# Altium PCB WeeMouseA3000internal.PcbDoc
Units mm, origin at the board's own origin, x right, y up, seen from the top; angles counter-clockwise.
Board outline 18.41 x 37.08 mm, 2 copper layers (F.Cu, B.Cu), stack 1.571 mm thick; 6 components, 13 nets, 36 pads, 24 vias.
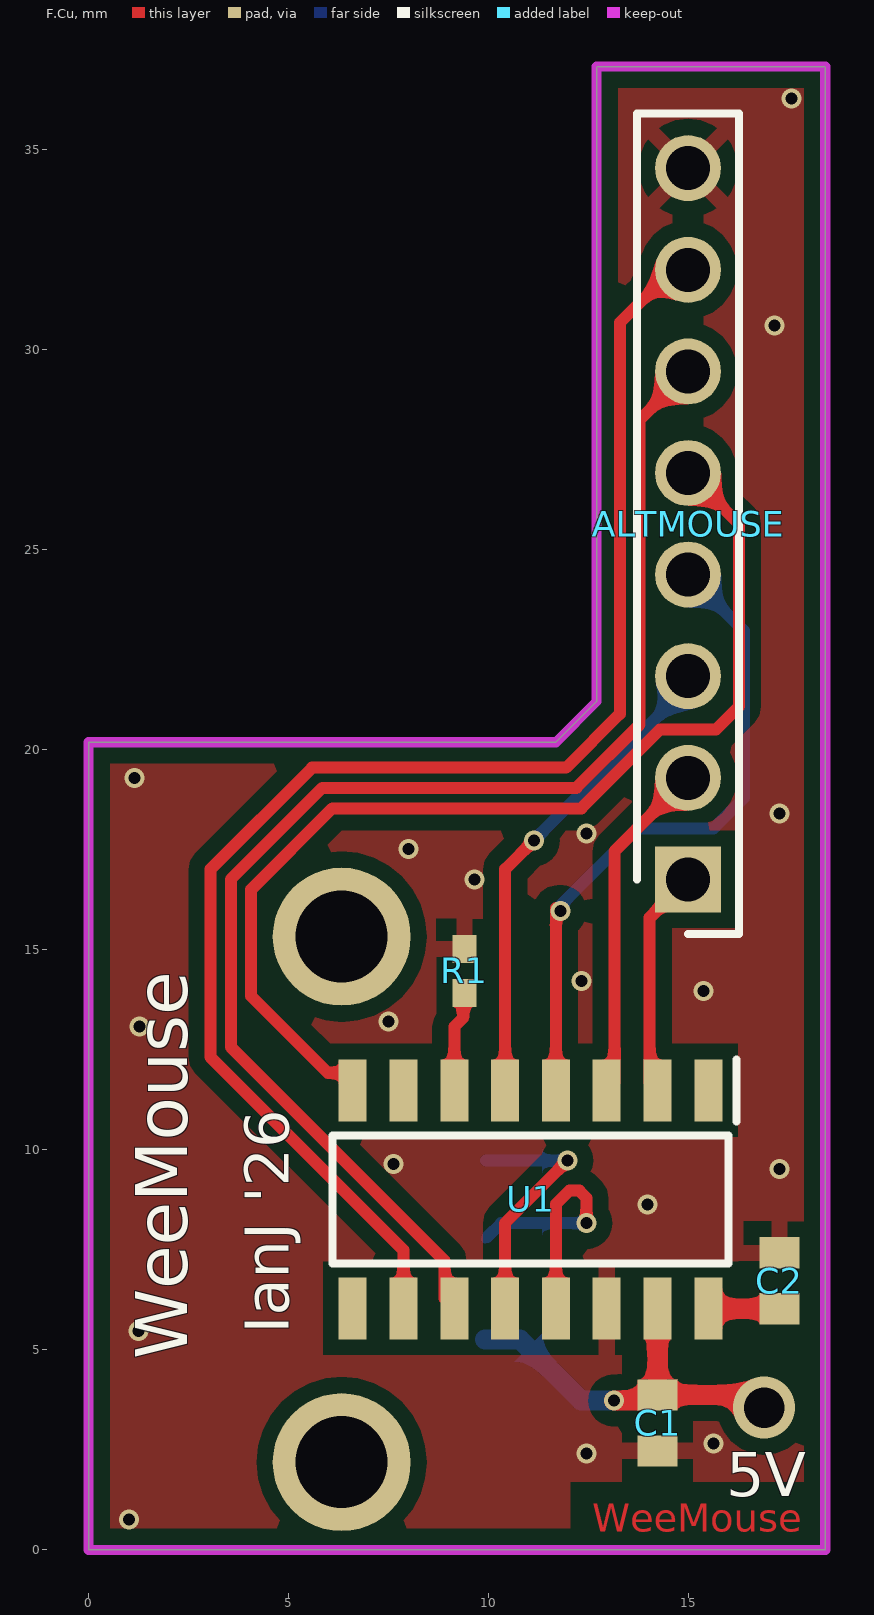
[diagram p0: F.Cu view]
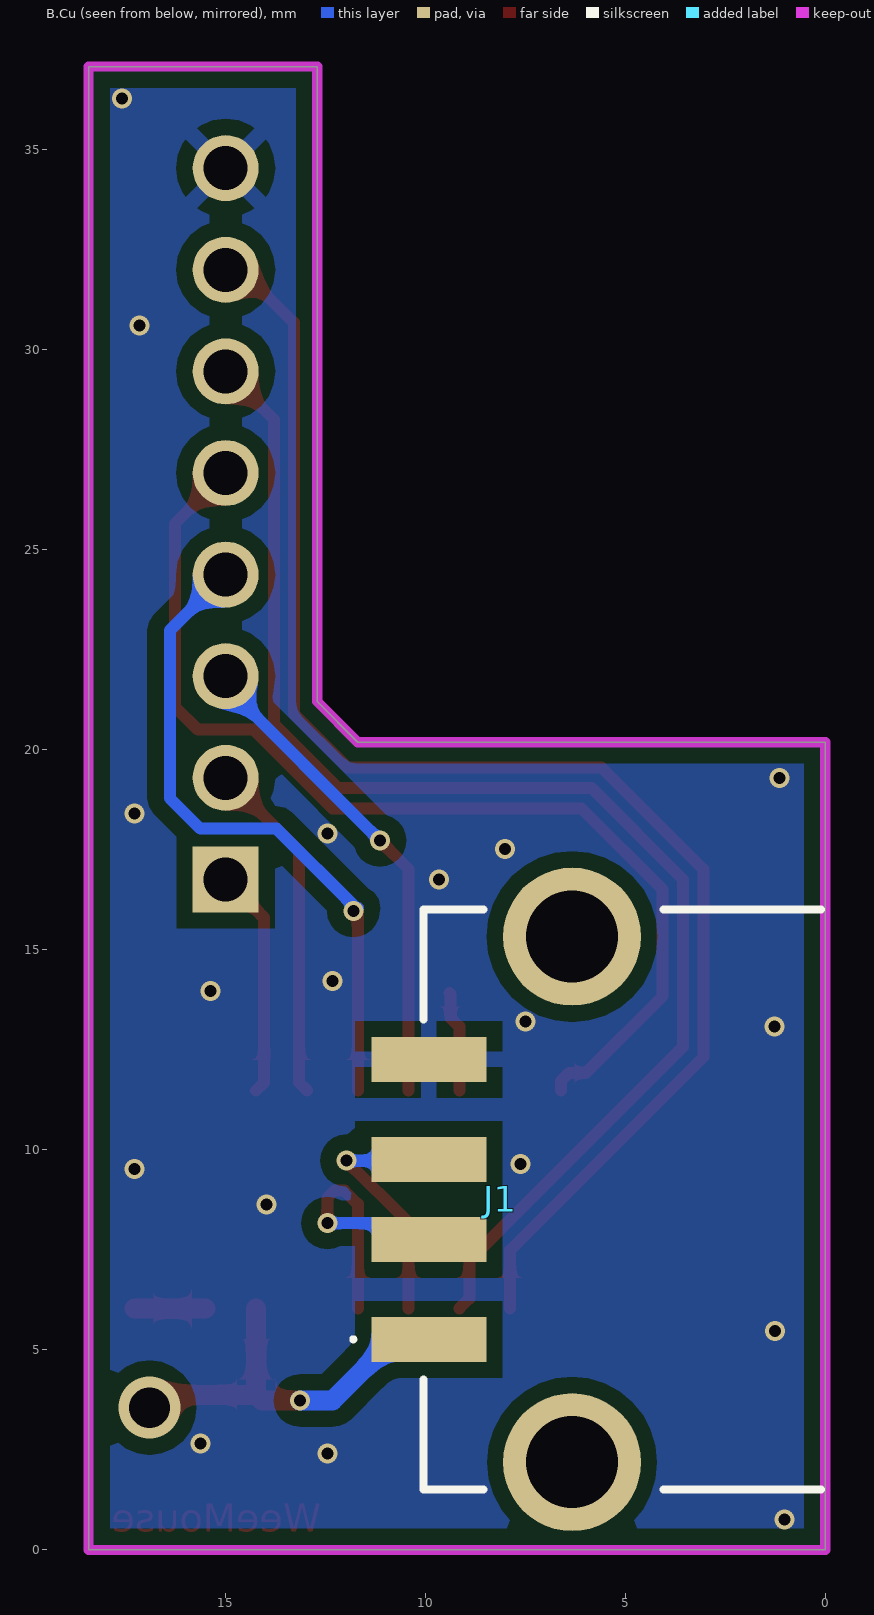
[diagram p1: B.Cu view, seen from below]
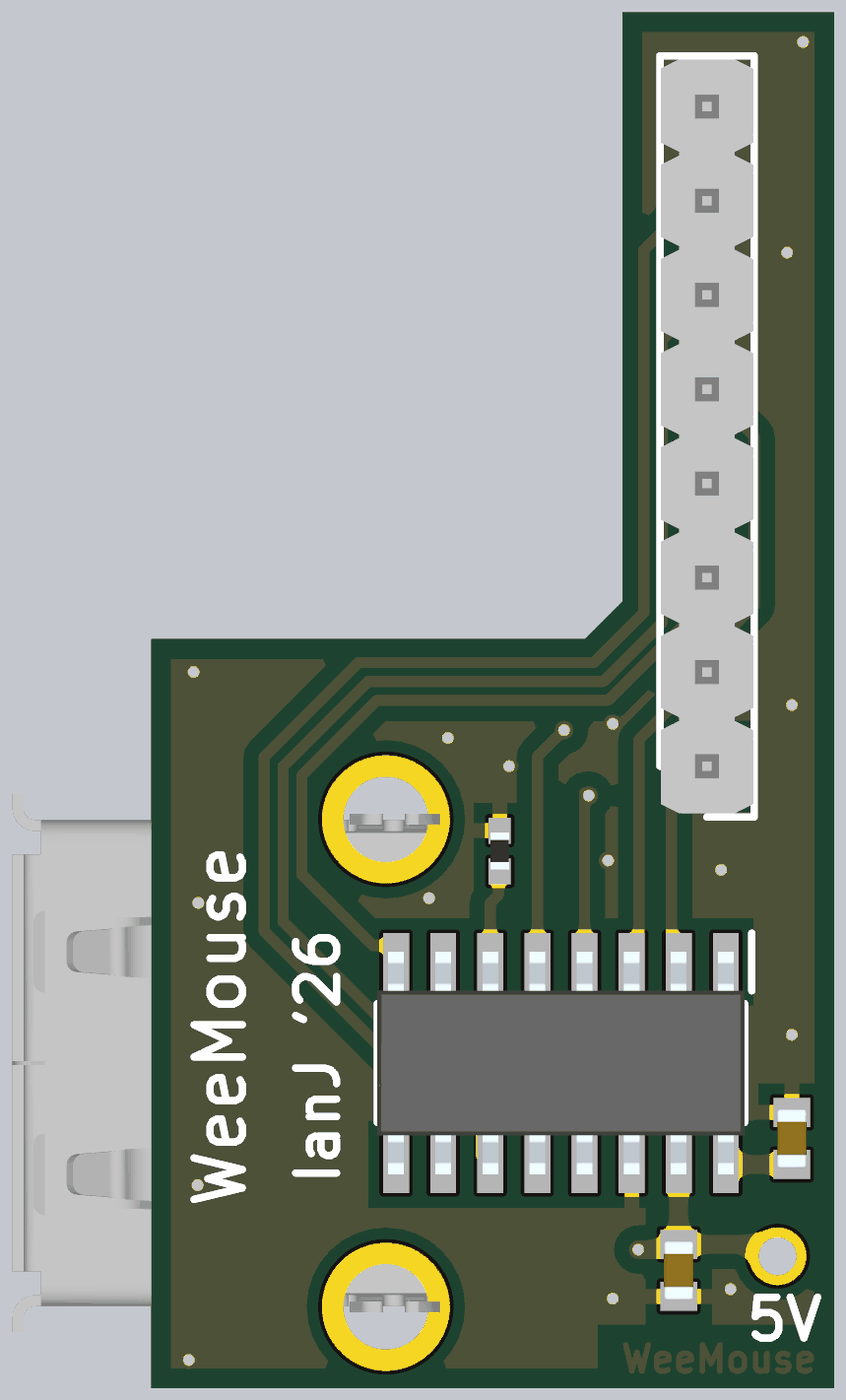
[diagram p2: 3D render of the assembled board from above, using the file's embedded part models]

## Layer stack, top to bottom
F.Mask: solder mask 0.0102, Solder Resist, Dk 3.5
F.Cu: signal copper 0.0356
Dielectric 2: prepreg 0.2, PP-006, Dk 4.1
Dielectric 1: dielectric 1.1, FR-4, Dk 4.8
Dielectric 3: prepreg 0.2, PP-006, Dk 4.1
B.Cu: signal copper 0.0356
B.Mask: solder mask 0.0102, Solder Resist, Dk 3.5

## Board outline
12.7,21.209 11.684,20.193 0,20.193 0,0 18.415,0 18.415,37.084 12.7,37.084

## Design rules (kind name [scope] priority, off if disabled: settings)
Clearance "Clearence 0.4_Polygon" [InNamedPolygon('B.Cu-GND') OR InNamedPolygon('F.Cu-GND')] p1: gap=0.4 ignorepadtopadclearanceinfootprint=FALSE
Clearance "Clearence 0.2_NetClass" [InNetClass('Default')] p2: gap=0.2 ignorepadtopadclearanceinfootprint=FALSE
HoleSize "Hole Size (Default)" [All] p1: absolutevalues=TRUE maxlimit=10 minlimit=0.3 maxpercent=80.000 minpercent=20.000
MinimumSolderMaskSliver [All] p1: minsoldermaskwidth=0
PolygonConnect Polygon_F.Cu-GND_ConnectDirect [IsNamedPolygon('F.Cu-GND') vs IsVia] p1: connectstyle=Direct reliefconductorwidth=0.254 reliefentries=4 polygonreliefangle="90 Angle" airgapwidth=0.254
PolygonConnect Polygon_F.Cu-GND_ConnectRelief45 [IsNamedPolygon('F.Cu-GND') vs (IsThruPin or IsSMTPin) and (PadShape_AllLayers = 'Round')] p2: connectstyle=Relief reliefconductorwidth=0.4 reliefentries=4 polygonreliefangle="45 Angle" airgapwidth=0.4
PolygonConnect Polygon_F.Cu-GND_ConnectRelief90 [IsNamedPolygon('F.Cu-GND') vs (IsThruPin or IsSMTPin) and (PadShape_AllLayers <> 'Round')] p3: connectstyle=Relief reliefconductorwidth=0.4 reliefentries=4 polygonreliefangle="90 Angle" airgapwidth=0.4
PolygonConnect Polygon_B.Cu-GND_ConnectDirect [IsNamedPolygon('B.Cu-GND') vs IsVia] p4: connectstyle=Direct reliefconductorwidth=0.254 reliefentries=4 polygonreliefangle="90 Angle" airgapwidth=0.254
PolygonConnect Polygon_B.Cu-GND_ConnectRelief45 [IsNamedPolygon('B.Cu-GND') vs (IsThruPin or IsSMTPin) and (PadShape_AllLayers = 'Round')] p5: connectstyle=Relief reliefconductorwidth=0.4 reliefentries=4 polygonreliefangle="45 Angle" airgapwidth=0.4
PolygonConnect Polygon_B.Cu-GND_ConnectRelief90 [IsNamedPolygon('B.Cu-GND') vs (IsThruPin or IsSMTPin) and (PadShape_AllLayers <> 'Round')] p6: connectstyle=Relief reliefconductorwidth=0.4 reliefentries=4 polygonreliefangle="90 Angle" airgapwidth=0.4
RoutingVias [All] p1: holewidth=0.711 width=1.27 viastyle="Through Hole" minholewidth=0.711 minwidth=1.27 maxholewidth=0.711 maxwidth=1.27
SilkToSilkClearance [All] p1: silktosilkclearance=0
SilkToSolderMaskClearance [IsPad] p1: minsilkscreentomaskgap=0 clearancetoexposedcopper=TRUE
SolderMaskExpansion [All] p1: expansion=0.102 istentingtop=FALSE
SupplyNets "Schematic Supply Nets_1" [InNet('VCC')] p1: voltage=0.000
SupplyNets "Schematic Supply Nets" [InNet('GND')] p2: voltage=0.000
Width [All] p1: maxlimit=10 minlimit=0.2 preferedwidth=0.25 minimp=50.000000 maximp=50.000000 favimp=50.000000
26 further rules are at their usual default settings.

## Classes and differential pairs
component class WeeMouse: C1 C2 J1 R1 U1

## Components (designator, comment, footprint, x,y, rotation, side; value= is the part's Value field where it differs from the comment)
ALTMOUSE "90120-0768" HDRV8W90P0X254_1X8_2032X249X560P 14.986,16.764 r90 top locked
C1 "100nF 0603" CAPC1608X90N 14.224,3.175 r270 top
C2 "100nF 0603" CAPC1608X90N 17.272,6.731 r270 top
J1 "87583-2010BLF" 875832010BLF 3.048,8.763 r90 bottom locked
R1 "0402 1K" RESC1005X40N 9.398,14.478 r270 top
U1 "CH544G SOIC16" SOIC127P600X175-16N 11.049,8.763 r270 top locked

## Footprints (in the part's own frame and the unit in brackets; to place one, negate y for a bottom-side part, rotate by r counter-clockwise, add the part's x,y. Pads: shape width x height; smd on the part's side, far side on the other; paste and mask are expansions set on the pad)
875832010BLF [mm]
  rect 1.12x2.88 smd: 1(-3.5,6.86) 2(-1,6.86) 3(1,6.86) 4(3.5,6.86)
  round 3.45 hole 2.3: MH1(-6.57,3.28) MH2(6.57,3.28)
  silkscreen extent -7.25,-2.95 7.25,8.8, body extent -7.25,-6.79 7.25,8.09, height 7.49
CAPC1608X90N [mm]
  rect 0.78x0.99 smd: 1(-0.7,0) 2(0.7,0)
  body extent -0.8,-0.41 0.8,0.41, height 0.9
HDRV8W90P0X254_1X8_2032X249X560P [mm]
  rect 1.65x1.65 hole 1.1: 1(0,0)
  round 1.65 hole 1.1: 2(2.54,0) 3(5.08,0) 4(7.62,0) 5(10.16,0) 6(12.7,0) 7(15.24,0) 8(17.78,0)
  silkscreen extent -1.37,-1.27 19.15,1.27, body extent -1.27,-1.25 19.05,1.25, height 5.27
RESC1005X40N [mm]
  rect 0.7x0.6 smd: 1(-0.55,0) 2(0.55,0)
  body extent -0.5,-0.25 0.5,0.25, height 0.4
SOIC127P600X175-16N [mm]
  rect 1.55x0.7 smd: 1(-2.725,4.445) 2(-2.725,3.175) 3(-2.725,1.905) 4(-2.725,0.635) 5(-2.725,-0.635) 6(-2.725,-1.905) 7(-2.725,-3.175) 8(-2.725,-4.445) 9(2.725,-4.445) 10(2.725,-3.175) 11(2.725,-1.905) 12(2.725,-0.635) 13(2.725,0.635) 14(2.725,1.905) 15(2.725,3.175) 16(2.725,4.445)
  silkscreen extent -3.5,-4.95 1.6,5.15, body extent -3,-4.95 3,4.95, height 1.75

## Part data
ALTMOUSE: "Connector", Manufacturer_Name=Molex, Mouser Part Number=538-90120-0768, Arrow Part Number=90120-0768, Arrow Price/Stock=http://www.arrow.com/en/products/90120-0768/molex, Datasheet Link=http://www.molex.com/molex/products/datasheet.jsp?part=active/0901200768_PCB_HEADERS.xml, Height=5.6mm, Manufacturer_Part_Number=90120-0768, Mouser Price/Stock=https://www.mouser.co.uk/ProductDetail/Molex/90120-0768?qs=PvP5v7EimsmChj6ovxYE3w%3D%3D
C1 C2: library part 06033C104KAT4A, "Capacitor", Manufacturer_Name=AVX, Mouser Part Number=581-06033C104KAT4A, Arrow Part Number=06033C104KAT4A, Arrow Price/Stock=https://www.arrow.com/en/products/06033c104kat4a/avx?region=nac, Datasheet Link=http://www.mouser.com/catalog/supplier/library/pdf/AVXSurfaceMountCeramic.pdf, Height=0.9mm, Manufacturer_Part_Number=06033C104KAT4A, Mouser Price/Stock=https://www.mouser.co.uk/ProductDetail/AVX/06033C104KAT4A?qs=8C2chATdSPiv3E9zfPZulg%3D%3D
J1: "Connector", Manufacturer_Name="Amphenol Communications Solutions", Arrow Part Number=87583-2010BLF, Arrow Price/Stock=https://www.arrow.com/en/products/87583-2010blf/amphenol-fci?region=europe, Datasheet Link=https://cdn.amphenol-cs.com/media/wysiwyg/files/drawing/87583.pdf, Height=7.94mm, Manufacturer_Part_Number=87583-2010BLF
R1: library part CRCW04021K00JNED, "Resistor", LCSC Part #=C279981, Manufacturer_Name=Vishay, Mouser Part Number=71-CRCW0402J-1.0K-E3, Arrow Part Number=CRCW04021K00JNED, Arrow Price/Stock=https://www.arrow.com/en/products/crcw04021k00jned/vishay, Datasheet Link=http://www.vishay.com/docs/20035/dcrcwe3.pdf, Height=0.4mm, Manufacturer_Part_Number=CRCW04021K00JNED, Mouser Price/Stock=https://www.mouser.co.uk/ProductDetail/Vishay-Dale/CRCW04021K00JNED?qs=YX%252BK5oaHNYpGRsHVuzxl1A%3D%3D
U1: library part CH544G, "8051 MCU with USB host", Manufacturer_Name=onsemi, Manufacturer_Part_Number=MM74HC4049M

## Via types
v1: diameter 0.5, hole 0.3, F.Cu to B.Cu, tented both sides, 23 vias
v2: diameter 1.55, hole 1.02, F.Cu to B.Cu, 1 vias

## Nets (pads, with @x,y where several pads share a name; then routed paths per layer and width w, separated by ;. In a path a pad name is that pad's centre, name@x,y a point inside that pad or via, vN(x,y) a via of type N, cw(c..) or ccw(c..) an arc to the next point about the centre after c; other vN are vias at no path point)
ButL: ALTMOUSE.5 U1.8 | length 26.8
  F.Cu w0.3: U1.8 6.604,11.727 6.404,11.927 5.98,11.927 4.064,13.843 4.064,16.51 6.096,18.542 12.319,18.542 14.283,20.506 15.68,20.506 16.256,21.082 16.256,25.654 ALTMOUSE.5
ButM: ALTMOUSE.6 U1.11 | length 34.2
  F.Cu w0.3: U1.11 8.894,6.288 8.894,7.235 3.556,12.573 3.556,16.764 5.842,19.05 12.192,19.05 13.777,20.635 13.777,28.255 ALTMOUSE.6
ButR: ALTMOUSE.7 U1.10 | length 36.9
  F.Cu w0.3: U1.10 7.874,7.493 3.048,12.319 3.048,17.018 5.588,19.558 11.938,19.558 13.283,20.903 13.283,30.682 14.605,32.004 ALTMOUSE.7
GND: ALTMOUSE.8 C1.2 C2.1 J1.4 R1.1 U1.14
  other v1: 1.016,0.762 12.446,2.413 15.621,2.667 1.249,5.471 13.97,8.636 17.272,9.525 7.62,9.652 1.27,13.081 7.493,13.208 15.367,13.97 12.319,14.224 9.652,16.764 8.001,17.526 12.446,17.907 17.272,18.415 1.143,19.304 17.145,30.607 17.573,36.285
Reset: R1.2 U1.6 | length 2.5
  F.Cu w0.3: U1.6 9.144,13.081 9.367,13.304 9.367,13.897 R1.2
UDM: J1.2 U1.13 | length 6.9
  F.Cu w0.3: U1.13 11.684,8.644 12.02,8.98 12.269,8.98 12.444,8.804 v1(12.444,8.171)
  B.Cu w0.2: J1.2 J1.2@9.967,7.822
  B.Cu w0.3: J1.2@9.967,7.822 10.316,8.171 v1(12.444,8.171)
UDP: J1.3 U1.12 | length 6.4
  F.Cu w0.3: U1.12 10.414,8.177 v1(11.969,9.732)
  B.Cu w0.2: J1.3 J1.3@9.939,9.732
  B.Cu w0.3: J1.3@9.939,9.732 v1(11.969,9.732)
V33: C2.2 U1.16 | length 1.8
  F.Cu w0.5: U1.16 15.501,6.031 C2.2
VCC: C1.1 J1.1 U1.15 | length 10
  F.Cu w0.5: v1(13.133,3.735) 14.084,3.735 C1.1 ; U1.15 C1.1 ; v2(16.891,3.556) 16.607,3.556 16.288,3.875 C1.1
  B.Cu w0.5: J1.1 10.788,5.263 12.316,3.735 v1(13.133,3.735)
X1: ALTMOUSE.2 U1.3 | length 8.7
  F.Cu w0.3: U1.3 13.149,11.683 13.149,17.467 ALTMOUSE.2
X2: ALTMOUSE.1 U1.2 | length 5.8
  F.Cu w0.3: U1.2 14.027,11.685 14.027,15.805 ALTMOUSE.1
Y1: ALTMOUSE.4 U1.4 | length 16.6
  F.Cu w0.3: U1.4 v1@11.684,16.047
  B.Cu w0.3: v1@11.684,16.047 11.729,16.047 13.716,18.034 15.621,18.034 16.383,18.796 16.383,22.987 ALTMOUSE.4
  other v1: 11.797,15.973
Y2: ALTMOUSE.3 U1.5 | length 12
  F.Cu w0.3: U1.5 10.414,17.018 v1(11.132,17.736)
  B.Cu w0.3: v1(11.132,17.736) ALTMOUSE.3@14.986,21.59
pads on no net: J1.MH1 J1.MH2 U1.1 U1.7 U1.9

## Polygon pours and split planes (outlines as drawn)
GND on F.Cu "F.Cu-GND" (solid, remove dead copper, pour order 1): 18.415,0 0,0 0,37.084 18.415,37.084
GND on B.Cu "B.Cu-GND" (solid, remove dead copper, pour order 0): 18.415,0 0,0 0,37.084 18.415,37.084

## Keep-outs
Edge.Cuts:
  the board outline again, w0.254

## Other copper
F.Cu:
  text "WeeMouse" at 12.598,0.458 h0.7

## Silkscreen, mask and mechanical layers (free items; w line width, h text height)
F.SilkS:
  text "IanJ '26" at 5.007,5.407 h1.1 r90
  text "WeeMouse" at 2.467,4.772 h1.3 r90
  text "5V" at 15.948,1.343 h1.1